# Altium PCB PCB1.PcbDoc
Units mm, origin at the board's own origin, x right, y up, seen from the top; angles counter-clockwise.
Board outline 111.76 x 66.17 mm, 2 copper layers (Top Layer, Bottom Layer); 59 components, 47 nets, 179 pads, 8 vias.
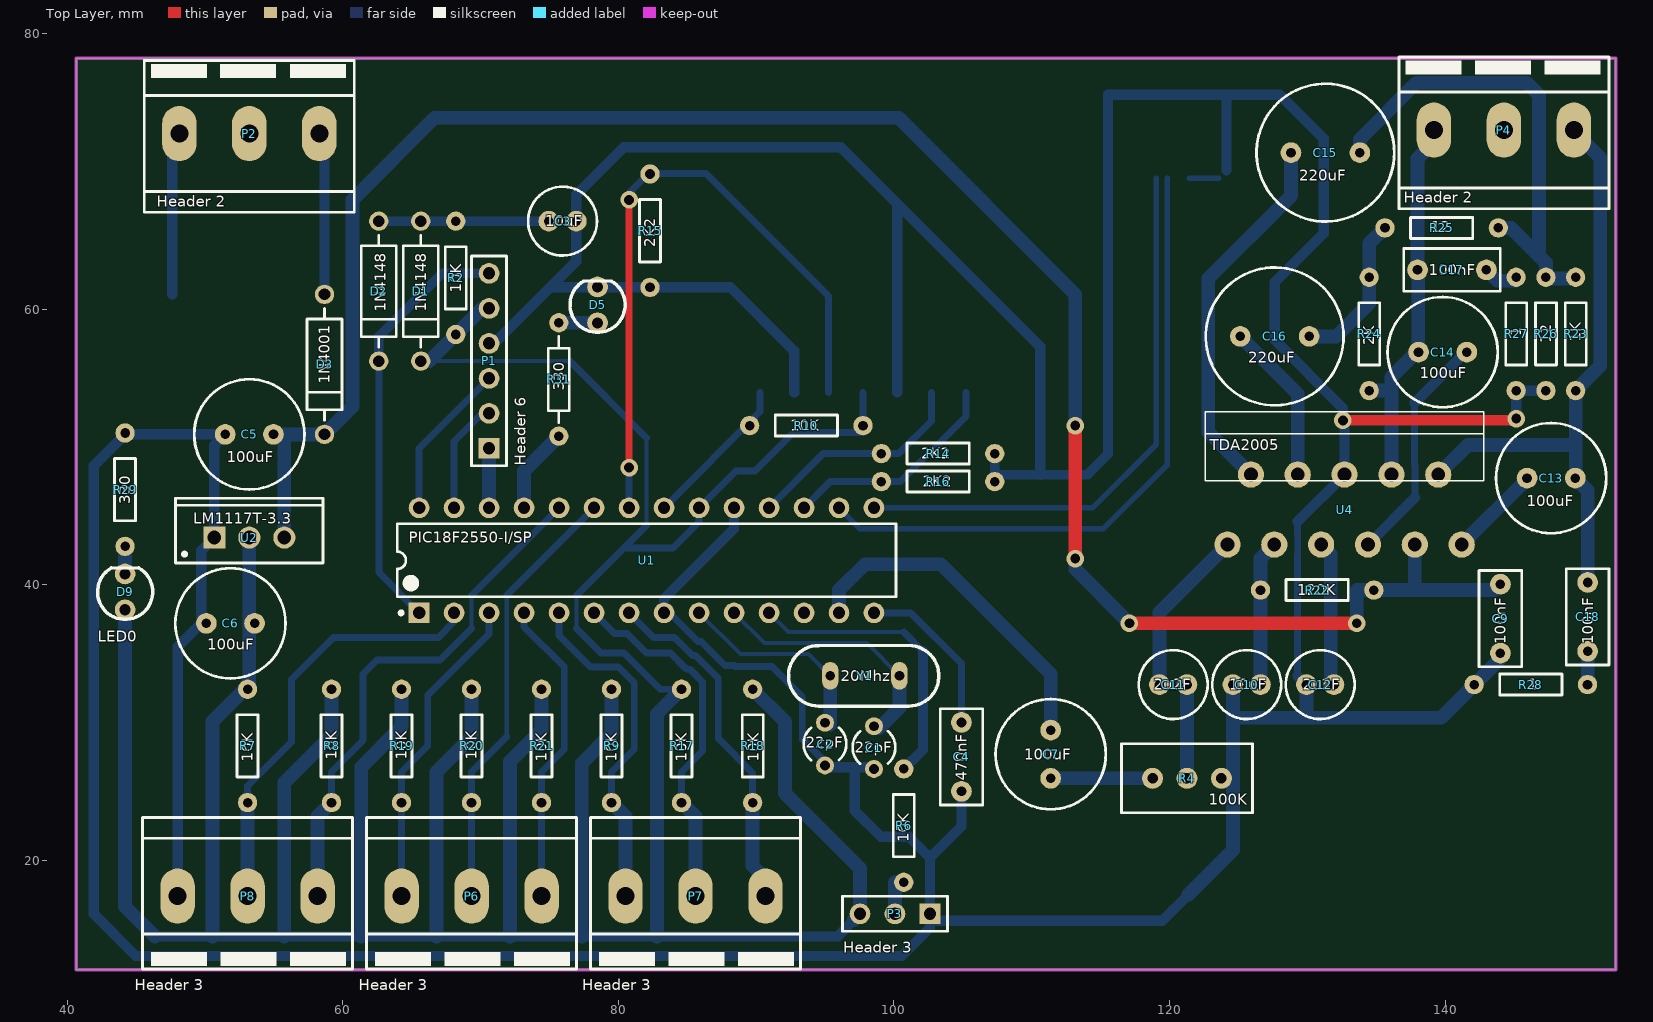
[diagram p0: Top Layer view]
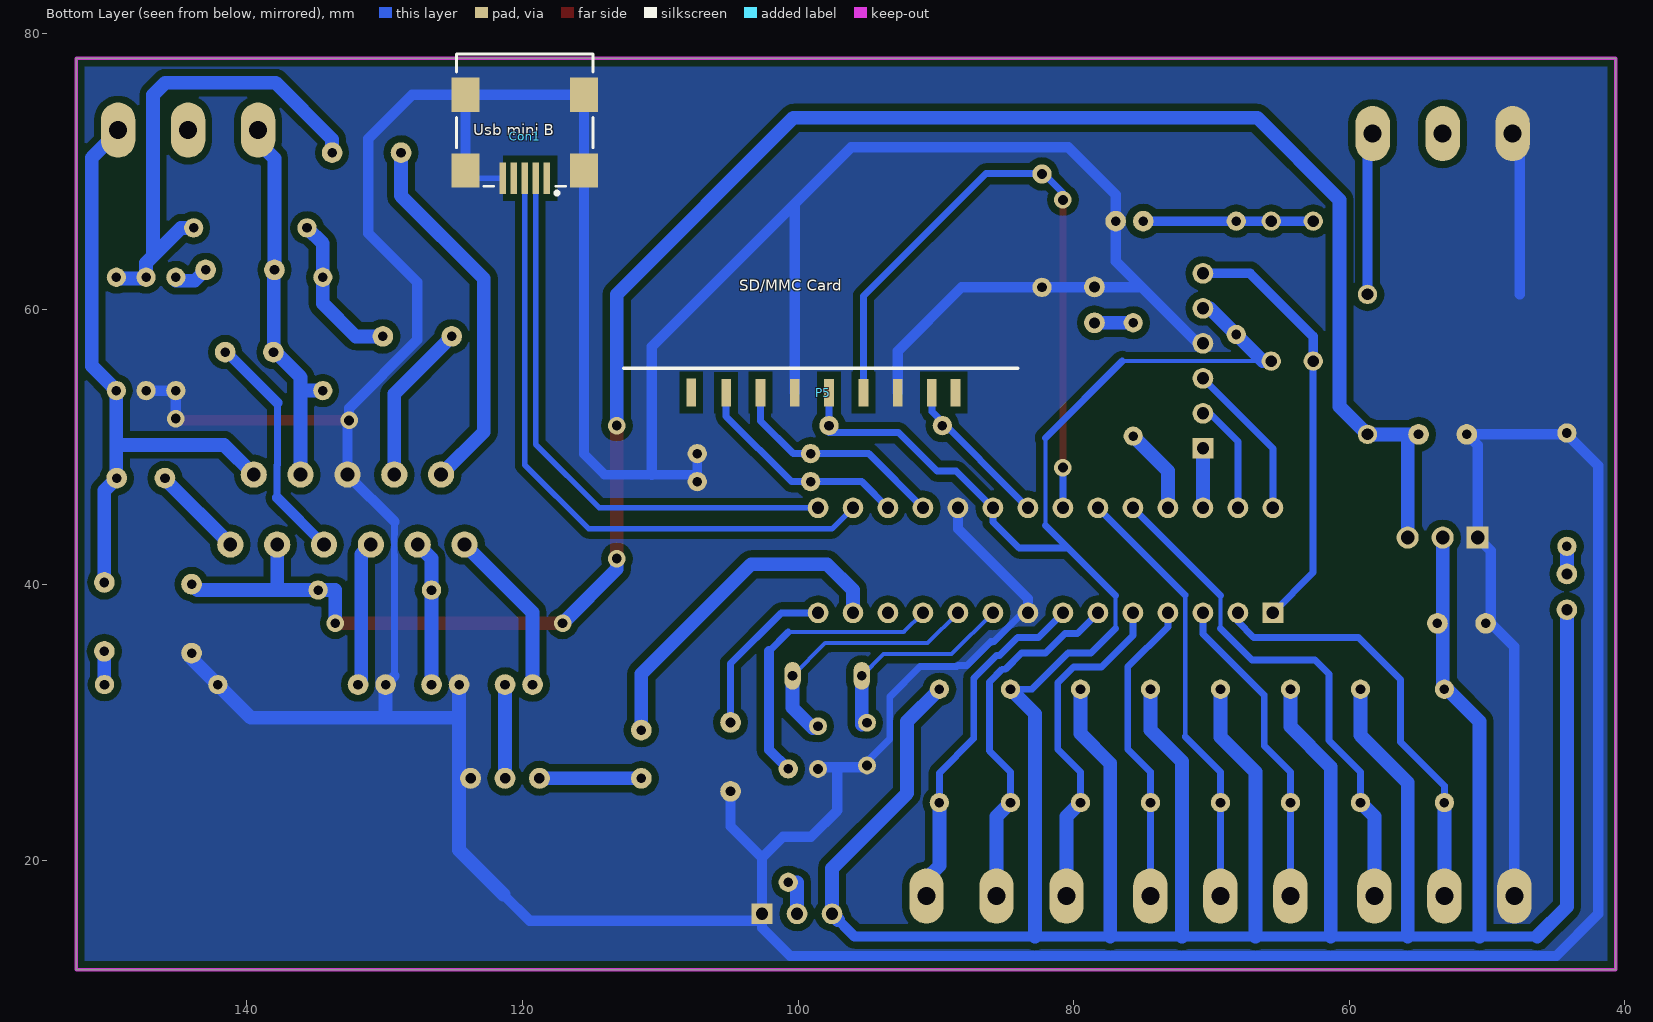
[diagram p1: Bottom Layer view, seen from below]

## Layer stack, top to bottom
Top Solder: solder mask 0.0102, Solder Resist, Dk 3.5
Top Layer: signal copper 0.0356
Dielectric1: dielectric 0.32, FR-4, Dk 4.8
Bottom Layer: signal copper 0.0356
Bottom Solder: solder mask 0.0102, Solder Resist, Dk 3.5

## Board outline
40.64,12.065 152.4,12.065 152.4,78.232 40.64,78.232

## Design rules (kind name [scope] priority, off if disabled: settings)
Clearance [All] p1: gap=0.5 ignorepadtopadclearanceinfootprint=FALSE except(0: Arc-Hole Track-Hole SMDPad-Hole THPad-Hole Via-Hole Fill-Hole Poly-Hole Region-Hole Text-Hole)
ComponentClearance [All] p1 off: gap=0.254 collisioncheckmode=3 verticalgap=0.254 showdistances=FALSE
Height [All] p1 off: minheight=0 maxheight=25.4 prefheight=12.7
PlaneConnect [All] p1: planeconnectstyle=Direct reliefexpansion=0.508 reliefentries=4 reliefconductorwidth=0.254 reliefairgap=0.254
PolygonConnect [All] p1: connectstyle=Direct reliefconductorwidth=0.254 reliefentries=4 polygonreliefangle="90 Angle" airgapwidth=0.254
RoutingVias [All] p1: holewidth=0.711 width=1.27 viastyle="Through Hole" minholewidth=0.711 minwidth=1.27 maxholewidth=0.711 maxwidth=1.27
SilkToSolderMaskClearance SilkscreenOverComponentPads [IsPad] p1: minsilkscreentomaskgap=0.254 clearancetoexposedcopper=TRUE
SolderMaskExpansion [All] p1: expansion=0.102
Width [All] p1: maxlimit=1 minlimit=0.254 preferedwidth=1
26 further rules are at their usual default settings.

## Components (designator, comment, footprint, x,y, rotation, side; value= is the part's Value field where it differs from the comment)
C1 "22pF" R38 98.552,28.194 r180 top
C2 "22pF" R38 94.996,28.448 r180 top
C3 "10uF" "CAP 5x11 - 2mm" 75.946,66.402 r0 top
C4 "470nF" "Cap 5mm" 104.902,25.019 r90 top
C5 "100uF" "CAP 8X11.5 - 3.5MM" 53.213,50.927 r180 top
C6 "100uF" "CAP 8X11.5 - 3.5MM" 51.844,37.211 r180 top
C7 "100uF" "CAP 8X11.5 - 3.5MM" 111.379,27.714 r270 top
C9 "100nF" "Cap 5mm" 144.018,35.052 r90 top
C10 "10uF" "CAP 5x11 - 2mm" 125.603,32.766 r180 top
C11 "2u2F" "CAP 5x11 - 2mm" 120.269,32.766 r0 top
C12 "2u2F" "CAP 5x11 - 2mm" 130.937,32.766 r180 top
C13 "100uF" "CAP 8X11.5 - 3.5MM" 147.701,47.752 r0 top
C14 "100uF" "CAP 8X11.5 - 3.5MM" 139.827,56.896 r180 top
C15 "220uF" "CAP 10x12.5 - 5mm" 131.318,71.374 r0 top
C16 "220uF" "CAP 10x12.5 - 5mm" 127.635,58.039 r0 top
C17 "100nF" "Cap 5mm" 143.002,62.865 r180 top
C18 "100nF" "Cap 5mm" 150.349,35.179 r90 top
Con1 "Usb mini B" "USB Mini B SMD" 118.237,69.977 r90 bottom
D1 "1N4148" "DO - 41" 65.659,66.392 r90 top
D2 "1N4148" "DO - 41" 62.611,66.392 r90 top
D3 "1N4001" "DO - 41" 58.674,61.077 r90 top
D5 "LED0" "Led 4mm" 78.486,60.325 r0 top
D9 "LED0" "Led 4mm" 44.196,39.497 r0 top
P1 "Header 6" "Header 6 way" 70.612,49.911 r90 top
P2 "Header 2" "KLEMENS 3P" 45.593,67.056 r0 top
P3 "Header 3" HDR1X3 102.616,16.129 r180 top
P4 "Header 2" "KLEMENS 3P" 136.652,67.31 r0 top
P5 "SD/MMC Card" SD/MMC 110.617,55.753 r180 bottom
P6 "Header 3" "KLEMENS 3P" 76.962,23.114 r180 top
P7 "Header 3" "KLEMENS 3P" 93.218,23.114 r180 top
P8 "Header 3" "KLEMENS 3P" 60.706,23.114 r180 top
R2 "10K" "Dip 0.3 inc" 68.199,66.402 r270 top
R4 "100K" "Trimpot dik" 118.519,25.964 r0 top
R6 "10K" "Dip 0.3 inc" 100.711,18.415 r90 top
R7 "10K" "Dip 0.3 inc" 53.086,32.429 r270 top
R8 "10K" "Dip 0.3 inc" 59.181,32.429 r270 top
R9 "10K" "Dip 0.3 inc" 79.501,32.429 r270 top
R10 "10K" "Dip 0.3 inc" 97.758,51.562 r180 top
R14 "2K2" "Dip 0.3 inc" 107.315,49.53 r180 top
R15 "2K2" "Dip 0.3 inc" 82.296,61.595 r90 top
R16 "2K2" "Dip 0.3 inc" 107.315,47.498 r180 top
R17 "10K" "Dip 0.3 inc" 84.581,32.429 r270 top
R18 "10K" "Dip 0.3 inc" 89.744,32.429 r270 top
R19 "10K" "Dip 0.3 inc" 64.261,32.429 r270 top
R20 "10K" "Dip 0.3 inc" 69.341,32.429 r270 top
R21 "10K" "Dip 0.3 inc" 74.421,32.429 r270 top
R22 "120K" "Dip 0.3 inc" 126.603,39.624 r0 top
R23 "1K" "Dip 0.3 inc" 149.479,54.102 r90 top
R24 "2K" "Dip 0.3 inc" 134.493,54.102 r90 top
R25 "12" "Dip 0.3 inc" 135.636,65.913 r0 top
R26 "12" "Dip 0.3 inc" 147.32,54.102 r90 top
R27 "1" "Dip 0.3 inc" 145.161,54.102 r90 top
R28 "1" "Dip 0.3 inc" 142.113,32.766 r0 top
R29 "330" "Dip 0.3 inc" 44.196,42.799 r90 top
R31 "330" "Dip 0.3 inc" 75.676,59.025 r270 top
U1 "PIC18F2550-I/SP" SPDIP300-SP28 82.042,41.783 r90 top
U2 "LM1117T-3.3" T03B 53.213,43.434 r0 top
U4 "TDA2005" Multiwatt11 124.206,42.926 r0 top
Y1 "20Mhz" Kristal 95.377,33.401 r0 top

## Footprints (in the part's own frame and the unit in brackets; to place one, negate y for a bottom-side part, rotate by r counter-clockwise, add the part's x,y. Pads: shape width x height; smd on the part's side, far side on the other; paste and mask are expansions set on the pad)
"Cap 5mm" [mm]
  round 1.5 hole 0.7: 1(0,0) 2(5,0)
  silkscreen extent -1,-1.55 6,1.55, body extent -1,-1.55 6,1.55, height 7.5
"CAP 5x11 - 2mm" [mm]
  round 1.5 hole 0.7: 1(-1,0) 2(1,0)
  silkscreen extent -2.5,-2.5 2.5,2.5, body extent -2.53,-2.53 2.53,2.53, height 11.53
"CAP 8X11.5 - 3.5MM" [mm]
  round 1.5 hole 0.7: 1(-1.75,0) 2(1.75,0)
  silkscreen extent -4,-4 4,4, body extent -4.03,-4.03 4.03,4.03, height 12.03
"CAP 10x12.5 - 5mm" [mm]
  round 1.5 hole 0.7: 1(-2.5,0) 2(2.5,0)
  silkscreen extent -5,-5 5,5, body extent -5.03,-5.03 5.03,5.03, height 13.03
"Dip 0.3 inc" [mm]
  round 1.4 hole 0.7: 1(0,0) 2(8.229,0)
  silkscreen extent 1.85,-0.76 6.38,0.76
"DO - 41" [mm]
  round 1.4 hole 0.85: 1(0.01,0) 2(-10.15,0)
  silkscreen extent -9.13,-1.27 -1.01,1.27, body extent -10.59,-1.37 0.43,1.37, height 2.73
HDR1X3 [mm] "Connector; Header; 3 Position"
  rect 1.5x1.5 hole 0.9: 1(0,0)
  round 1.5 hole 0.9: 2(2.54,0) 3(5.08,0)
  silkscreen extent -1.27,-1.27 6.35,1.27
"Header 6 way" [mm]
  rect 1.5x1.5 hole 0.9: 1(0,0)
  round 1.5 hole 0.9: 2(2.54,0) 3(5.08,0) 4(7.62,0) 5(10.16,0) 6(12.7,0)
  silkscreen extent -1.27,-1.27 13.97,1.27, body extent -1.15,-1.17 13.83,1.17, height 10.84
"KLEMENS 3P" [mm]
  oval 2.5x4 hole 1.3: 1(2.54,5.7) 2(7.62,5.7) 3(12.7,5.7)
  silkscreen extent 0,0 15.24,11, body extent -0.01,0.5 15.97,10.45, height 14.2
Kristal [mm]
  oval 1.2x2 hole 0.7: 1(0,0) 2(5.024,0)
  silkscreen extent -3.03,-2.2 7.88,2.2, body extent -3.16,-2.34 8.01,2.33, height 3.63
"Led 4mm" [mm]
  round 1.5 hole 0.8: 1(0,-1.3) 2(0,1.3)
  silkscreen extent -2,-2 2,1.73, body extent -1.62,-1.65 1.67,1.65, height 5.51
Multiwatt11 [mm]
  round 1.9 hole 1: 1(0,0) 2(1.7,5.08) 3(3.4,0) 4(5.1,5.08) 5(6.8,0) 6(8.5,5.08) 7(10.2,0) 8(11.9,5.08) 9(13.6,0) 10(15.3,5.08) 11(17,0)
  silkscreen extent -1.6,4.63 18.6,9.63, body extent -1.6,-0.26 18.6,9.63, height 21.8
R38 [mm] "Crystal, Thru-Hole; 2 Leads; Body 3.1 x 8.2 mm (Dia.xH)"
  round 1.3 hole 0.7: 1(0,1.55) 2(0,-1.55)
  silkscreen extent -1.55,-1.19 1.55,1.17
SD/MMC [mm]
  rect 0.7x2 smd: 1(2.866,-1.789) 2(5.398,-1.8) 3(7.896,-1.79) 4(10.387,-1.792) 5(12.859,-1.792) 6(15.37,-1.792) 7(17.856,-1.792) 8(20.326,-1.791) 9(22.041,-1.792)
  silkscreen extent -2.05,-0.01 26.55,-0.01, body extent -2.05,-1.31 26.55,34.19, height 3.01
SPDIP300-SP28 [mm] "DIP, 28-Leads, Row Spacing 7.62mm, Pitch 2.54mm, Body 34.9x6.8mm"
  rect 1.5x1.5 hole 0.9: 1(-3.81,16.51)
  round 1.5 hole 0.9: 2(-3.81,13.97) 3(-3.81,11.43) 4(-3.81,8.89) 5(-3.81,6.35) 6(-3.81,3.81) 7(-3.81,1.27) 8(-3.81,-1.27) 9(-3.81,-3.81) 10(-3.81,-6.35) 11(-3.81,-8.89) 12(-3.81,-11.43) 13(-3.81,-13.97) 14(-3.81,-16.51) 15(3.81,-16.51) 16(3.81,-13.97) 17(3.81,-11.43) 18(3.81,-8.89) 19(3.81,-6.35) 20(3.81,-3.81) 21(3.81,-1.27) 22(3.81,1.27) 23(3.81,3.81) 24(3.81,6.35) 25(3.81,8.89) 26(3.81,11.43) 27(3.81,13.97) 28(3.81,16.51)
  silkscreen extent -3.93,-18.1 2.65,18.1, body extent -3.55,-18.1 3.55,18.1, height 5.08
T03B [mm] "TO, Thru-Hole, Vertical, Heatsink Mounted; 3 In-Line Leads; Pitch 2.54 mm"
  rect 1.6x1.6 hole 1: 1(-2.54,0)
  round 1.6 hole 1: 2(0,0) 3(2.54,0)
  silkscreen extent -5.35,-1.85 5.35,2.85, body extent -5.4,-1.9 5.4,2.9, height 19.4
"Trimpot dik" [mil]
  round 60 hole 30: 1(9.84,0) 2(108.27,0) 3(206.69,0)
  silkscreen extent -79,-98 295,98, body extent -79,-98 295,98, height 453
"USB Mini B SMD" [mm]
  rect 2.3x0.5 smd: 1(-0.46,0) 2(-0.46,0.8) 3(-0.46,1.6) 4(-0.46,2.4) 5(-0.46,3.2)
  rect 2.5x2 smd: 6(0.1,-2.7) 6(0.1,5.9) 6(5.6,-2.7) 6(5.6,5.9)
  silkscreen extent -1.66,-3.35 8.55,6.55, body extent -0.74,-3.35 8.51,6.55, height 3.93

## Part data
C1 C2 C4 C9 C17 C18: library part Cap, "Capacitor"
C3 C5 C6 C7 C10 C11 C12 C13 C14 C15 C16: library part "Cap Pol1", "Polarized Capacitor (Radial)"
D1 D2: library part "Diode 1N914", "High Conductance Fast Diode"
D3: library part Diode, "Default Diode"
D5 D9: "Typical INFRARED GaAs LED"
P1: "Header, 6-Pin"
P2 P4: "Header, 2-Pin"
P3 P6 P7 P8: "Header, 3-Pin"
P5: library part "MMC Kart"
R2 R6 R7 R8 R9 R10 R14 R15 R16 R17 R18 R19 R20 R21 R22 R23 R24 R25 R26 R27 R28 R29 R31: library part Res1, "Resistor"
R4: library part "Res Tap", "Tapped Resistor"
U1: "High Performance, Enhanced Flash, USB Microcontroller with nanoWatt Technology, 32K Flash, 28-Pin SPDIP, Industrial Temperature Range"
U2: "800mA Low-Dropout Linear Regulator"
Y1: library part XTAL, "Crystal Oscillator"

## Via types
v1: diameter 1.27, hole 0.711, Top Layer to Bottom Layer, 8 vias

## Nets (pads, with @x,y where several pads share a name; then routed paths per layer and width w, separated by ;. In a path a pad name is that pad's centre, name@x,y a point inside that pad or via, vN(x,y) a via of type N, cw(c..) or ccw(c..) an arc to the next point about the centre after c; other vN are vias at no path point)
3V3: C6.1 D1.2 D9.1 P1.5 P3.3 P5.5 R2.2 R7.1 R8.1 R9.1 R10.1 R17.1 R18.1 R19.1 R20.1 R21.1 U1.20 U2.2 | length 315.6
  Bottom Layer w0.3: D1.2@65.662,56.245 76.47,56.245 ; 76.962,36.83 76.962,39.243 ; 82.042,44.323 82.042,50.673
  Bottom Layer w0.5: D1.2 D1.2@65.662,56.245 ; 76.47,56.245 82.042,50.673 ; 76.962,36.83 78.74,35.052 80.391,35.052 83.014,32.429 R17.1 ; 76.962,39.243 80.391,42.672 ; 82.042,44.323 80.391,42.672 ; P5.5 97.758,51.054 92.71,51.054 89.916,48.26 88.519,48.26 U1.20 85.852,44.577 83.947,42.672 80.391,42.672
  Bottom Layer w0.75: 46.355,14.478 95.885,14.478 P3.3
  Bottom Layer w1: D9.1 44.196,16.637 46.355,14.478 ; 50.546,14.478 50.546,30.099 53.213,32.766 53.213,37.211 U2.2 ; 55.753,14.478 55.753,25.654 59.181,29.082 R8.1 ; 61.341,14.478 61.341,26.797 64.261,29.717 R19.1 ; D1.2 66.268,56.242 70.097,60.071 P1.5 ; 66.802,14.478 66.802,26.416 69.341,28.955 R20.1 ; 72.136,14.478 72.136,27.178 74.421,29.463 R21.1 ; 77.343,14.478 77.343,27.051 79.501,29.209 R9.1 ; 82.804,14.478 82.804,30.652 R17.1 ; R18.1 92.095,30.078 92.095,24.872 97.536,19.431 P3.3 P3.3@97.091,15.684
12V: C5.1 C9.2 D3.2 R22.2 U2.3 U4.9 | length 147
  Top Layer w1: v1(113.157,41.91) v1(113.157,51.562) ; v1(117.094,37.211) v1(133.585,37.211)
  Bottom Layer w1: C5.1 D3.2 60.706,52.959 60.706,67.945 66.675,73.914 100.33,73.914 113.157,61.087 v1(113.157,51.562) ; U2.3 55.753,50.546 ; v1@113.157,41.656 113.157,41.148 v1(117.094,37.211) ; v1(133.585,37.211) 133.585,39.624 137.795,39.624 ; 137.795,40.375 137.795,39.624 ; 137.806,40.375 U4.9 ; C9.2 143.59,39.624 137.795,39.624
BUTON1: P8.2 R7.2 U1.2 | length 30
  Bottom Layer w0.5: R7.2 53.086,25.42 56.261,28.595 56.261,33.147 59.309,36.195 66.929,36.195 68.072,37.338 U1.2
  Bottom Layer w1: P8.2@53.086,18.684 R7.2
BUTON2: P6.3 R19.2 U1.3 | length 23.2
  Bottom Layer w0.5: P6.3 64.262,26.434 66.167,28.339 66.167,32.004 70.612,36.449 U1.3
BUTON3: P7.3 R9.2 U1.5 | length 23.8
  Bottom Layer w0.5: U1.5 75.692,36.322 77.978,34.036 79.993,34.036 81.153,32.876 81.153,28.087 79.501,26.435 R9.2
  Bottom Layer w1: R9.2 80.518,23.183 P7.3@80.518,18.684
BUTON4: P7.2 R17.2 U1.6 | length 25.3
  Bottom Layer w0.5: U1.6 79.732,36.473 80.621,36.473 82.042,35.052 83.786,35.052 84.958,33.879 85.182,33.879 86.106,32.955 86.106,27.96 84.581,26.435 R17.2
  Bottom Layer w1: R17.2 85.598,23.183 P7.2@85.598,18.684
BUTON5: P7.1 R18.2 U1.7 | length 24.4
  Bottom Layer w0.5: U1.7 82.55,36.195 84.057,36.195 85.372,34.879 85.596,34.879 87.233,33.242 87.233,33.163 87.249,33.147 87.249,28.847 89.744,26.352 R18.2
  Bottom Layer w1: R18.2 89.744,19.618 P7.1@90.678,18.684
BUTON6: P6.1 R21.2 U1.4 | length 22.5
  Bottom Layer w0.5: U1.4 73.152,36.957 76.073,34.036 76.073,28.087 74.422,26.436 74.422,24.199 P6.1
BUTON7: P8.1 R8.2 U1.24 | length 36.8
  Bottom Layer w0.3: 69.342,36.83 69.342,39.243
  Bottom Layer w0.5: R8.2 59.181,26.435 61.468,28.722 61.468,33.528 62.484,34.544 67.056,34.544 69.342,36.83 ; 69.342,39.243 U1.24
  Bottom Layer w1: P8.1@58.166,18.684 58.166,23.185 R8.2
BUTON8: P6.2 R20.2 U1.23 | length 31.9
  Bottom Layer w0.3: 71.898,28.992 71.898,39.259
  Bottom Layer w0.5: P6.2 69.341,26.435 71.898,28.992 ; 71.898,39.259 U1.23
GND: C1.1 C2.1 C3.2 C4.1 C5.2 C6.2 C9.1 C10.2 C12.2 Con1.5 Con1.6 D5.2 P1.4 P2.1 P3.1 P5.4 P5.7 P8.3 R4.3 R14.1 R15.1 R16.1 R26.1 R27.1 R28.1 R29.2 U1.8 U1.19 U2.1 U4.6 | length 486.2
  Top Layer w0.75: v1(132.588,51.943) v1@145.034,51.943
  Bottom Layer w0.4: Con1.5 Con1.6@123.577,69.517
  Bottom Layer w0.5: U1.8 83.693,37.973 85.787,35.879 86.01,35.879 87.737,34.152 88.4,34.152 88.479,34.073 91.149,34.073 93.345,31.877 93.345,28.803 C2.1@95.377,26.771 ; 129.286,33.417 129.286,42.202 129.306,42.222 129.306,43.63 129.286,43.65 129.286,44.586
  Bottom Layer w0.7: R14.1@107.315,49.403 107.315,48.006 110.617,48.006 114.046,48.006 115.537,49.497 Con1.6@115.537,70.077
  Bottom Layer w0.75: 47.625,61.087 47.625,72.248 P2.1 ; P8.3@48.006,18.684 48.006,35.504 49.713,37.211 49.713,42.474 U2.1 50.673,50.137 C5.2 44.196,50.927 41.91,48.641 41.91,16.129 44.972,13.067 100.576,13.067 102.616,15.107 P3.1@102.616,15.621 ; P1.4 70.993,57.531 76.946,63.484 76.946,68.31 80.391,71.755 96.139,71.755 100.23,67.664 ; 75.184,61.595 88.138,61.595 92.761,56.972 P5.7 ; U1.8 83.312,38.989 88.392,44.069 U1.19 ; C2.1@95.377,26.771 97.155,26.771 ; C1.1@98.552,26.771 97.155,26.771 ; P5.4 100.23,67.664 ; C4.1 104.902,22.479 102.616,20.193 ; 110.617,48.006 110.617,57.277 100.23,67.664 ; Con1.6@115.537,70.077 115.537,75.577 Con1.6@124.137,75.577 ; 121.379,17.526 119.474,15.621 P3.1@102.616,15.621 ; Con1.6@124.137,70.077 Con1.6@124.137,75.577 ; 129.286,33.417 C12.2 ; 129.286,44.586 U4.6 v1@132.706,51.825 ; v1(132.588,51.943) 132.588,52.832 127.635,57.785 127.635,61.976 131.191,65.532 131.191,72.39 128.004,75.577 Con1.6@124.137,75.577 ; v1(145.161,52.07) R27.1 R26.1 ; 97.155,26.771 97.155,23.622 99.06,21.717 101.092,21.717 102.616,20.193 ; P3.1@102.616,15.621 P3.1 102.616,20.193
  Bottom Layer w1: 121.379,17.526 124.603,20.75 124.603,30.353 ; C10.2 124.603,30.353 ; 129.937,30.496 C12.2 ; C9.1 144.018,34.671 139.7,30.353 124.603,30.353
MCLR: D2.2 P1.6 U1.1 | length 31.2
  Bottom Layer w0.5: D2.2 62.611,40.894 U1.1
  Bottom Layer w0.7: D2.2 62.611,58.039 67.183,62.611 P1.6
MISO: P5.8 R10.2 U1.21 | length 11.3
  Bottom Layer w0.5: U1.21 90.291,52.572 P5.8
MOSI: P5.3 R14.2 U1.18 | length 16.5
  Bottom Layer w0.5: U1.18 94.869,49.53 100.349,49.53 102.721,51.902 P5.3
NetC3_1: C3.1 D1.1 D2.1 R2.1 | length 12.3
  Bottom Layer w0.7: D2.1 D1.1 R2.1 C3.1
NetC4_2: C4.2 U1.14 | length 12.1
  Bottom Layer w0.5: U1.14 101.219,37.973 104.902,34.29 C4.2
NetC7_2: C7.2 R4.1 | length 7.4
  Bottom Layer w1: C7.2 R4.1
NetC10_1: C10.1 R22.1 U4.3 | length 10.6
  Bottom Layer w1: C10.1 126.603,41.923 U4.3
NetC11_1: C11.1 U4.1 | length 12.2
  Bottom Layer w1: C11.1 119.269,37.989 U4.1
NetC12_1: C12.1 U4.5 | length 10.5
  Bottom Layer w1: U4.5 131.699,42.233 131.699,33.004 C12.1
NetC13_1: C13.1 U4.11 | length 6.8
  Bottom Layer w1: U4.11 145.951,47.671 C13.1
NetC13_2: C13.2 C18.2 P4.3 R23.1 U4.10 | length 45
  Bottom Layer w1: U4.10 141.665,50.165 149.479,50.165 ; P4.3@149.733,72.532 151.257,71.008 151.257,55.88 R23.1 149.479,50.165 ; C18.2 150.349,46.854 C13.2 149.479,47.78 149.479,50.165
NetC14_1: C14.1 U4.7 | length 17.1
  Bottom Layer w0.5: 137.795,46.315 137.806,46.326 137.806,48.71 137.795,48.721 137.795,53.213
  Bottom Layer w0.75: U4.7 137.795,46.315 ; 137.795,53.213 C14.1@141.605,57.023
NetC14_2: C14.2 C17.2 P4.1 R24.1 U4.8 | length 27.5
  Bottom Layer w1: R24.1 135.979,54.102 ; U4.8 136.106,55.08 138.049,57.023 138.049,62.818 C17.2 138.002,70.961 P4.1@139.573,72.532
NetC15_1: C15.1 U4.2 | length 27.1
  Bottom Layer w1: U4.2 122.809,51.103 122.809,62.23 128.818,68.239 C15.1
NetC15_2: C15.2 R23.2 R25.2 R26.2 | length 36.2
  Bottom Layer w1: C15.2 133.818,72.35 137.922,76.454 145.923,76.454 146.812,75.565 146.812,63.881 147.32,63.373 ; R25.2 144.78,65.913 147.32,63.373 ; R23.2@149.479,62.23 147.32,62.23 147.32,63.373
NetC16_1: C16.1 U4.4 | length 11.8
  Bottom Layer w1: C16.1 129.306,53.868 U4.4
NetC16_2: C16.2 R24.2 R25.1 | length 11.3
  Bottom Layer w1: C16.2 132.099,58.039 134.493,60.433 134.493,64.77 R25.1
NetC17_1: C17.1 R27.2 | length 2.5
  Bottom Layer w1: C17.1 143.79,62.077 R27.2@145.161,62.077
NetC18_1: C18.1 R28.2 | length 2.4
  Bottom Layer w1: R28.2@150.349,32.766 C18.1
NetCon1_2: Con1.2 U1.15 | length 41.7
  Bottom Layer w0.4: U1.15 114.427,45.593 119.037,50.203 Con1.2
NetCon1_3: Con1.3 U1.16 | length 47.2
  Bottom Layer w0.4: U1.16 97.536,44.069 115.189,44.069 119.837,48.717 Con1.3
NetD3_1: D3.1 P2.3 | length 11.8
  Bottom Layer w0.75: P2.3 58.674,72.375 D3.1
NetD5_1: D5.1 R31.1 | length 2.8
  Bottom Layer w1: R31.1 D5.1
NetD9_2: D9.2 R29.1 | length 1.6
  Bottom Layer w1: D9.2 R29.1@44.196,42.418
NetP3_2: P3.2 R6.1 | length 2.3
  Bottom Layer w1: P3.2 R6.1@100.076,18.415
NetR31_2: R31.2 U1.25 | length 6.2
  Bottom Layer w1: U1.25 73.152,48.272 R31.2
OSC1: C2.2 U1.9 Y1.1 | length 14.9
  Bottom Layer w0.3: U1.9 88.852,34.973 93.805,34.973 Y1.1
  Bottom Layer w1: C2.2@95.377,29.871 Y1.1
OSC2: C1.2 U1.10 Y1.2 | length 18.3
  Bottom Layer w0.3: U1.10 90.592,35.773 94.383,35.773 94.386,35.776 95.098,35.776 95.101,35.773 96.923,35.773 96.926,35.776 97.638,35.776 97.641,35.773 98.029,35.773 Y1.2
  Bottom Layer w1: C1.2@98.933,29.617 100.401,31.085 Y1.2
PGC: P1.2 U1.27 | length 8.2
  Bottom Layer w0.5: U1.27 68.072,50.419 70.104,52.451 P1.2
PGD: P1.3 U1.28 | length 11.5
  Bottom Layer w0.5: U1.28 65.532,49.911 P1.3
PGM: P1.1 U1.26 | length 4.3
  Bottom Layer w1: U1.26 P1.1
"PWM SES ЗэKэюэ": C7.1 U1.13 | length 25.2
  Bottom Layer w1: U1.13 96.012,39.624 97.891,41.503 103.404,41.503 111.379,33.528 C7.1
SCK: P5.6 R15.2 U1.22 | length 48.6
  Top Layer w0.5: v1(80.772,48.514) v1(80.772,67.945)
  Bottom Layer w0.5: U1.22 v1(80.772,48.514) ; v1(80.772,67.945) 80.772,68.453 82.169,69.85 86.36,69.85 95.247,60.963 P5.6
"SES ЗэKэюэ": C11.2 R4.2 | length 6.8
  Bottom Layer w1: R4.2 C11.2
SS: P5.2 R16.2 U1.17 | length 16.2
  Bottom Layer w0.5: U1.17 95.377,47.498 100.476,47.498 105.219,52.241 P5.2
"ЗALэюMA MODU": R6.2 U1.11 | length 21.5
  Bottom Layer w0.3: U1.11 92.332,36.573 94.052,36.573 94.055,36.576 95.429,36.576 95.432,36.573 96.592,36.573 96.595,36.576 97.969,36.576 97.972,36.573 99.132,36.573 99.135,36.576 100.711,36.576
  Bottom Layer w0.5: 100.711,36.576 102.108,35.179
  Bottom Layer w0.75: R6.2 102.108,28.041 102.108,35.179
pads on no net: Con1.1 Con1.4 P2.2 P4.2 P5.1 P5.9 U1.12

## Polygon pours and split planes (outlines as drawn)
GND on Bottom Layer "Bottom Layer-No Net" (solid, remove dead copper, pour order 5): 40.64,12.065 40.64,78.232 152.4,78.232 152.4,12.065

## Keep-outs
Keep-Out Layer:
  the board outline again, w0.254